# EAGLE board msp430_minimal_schematic (EAGLE 7.0.0)
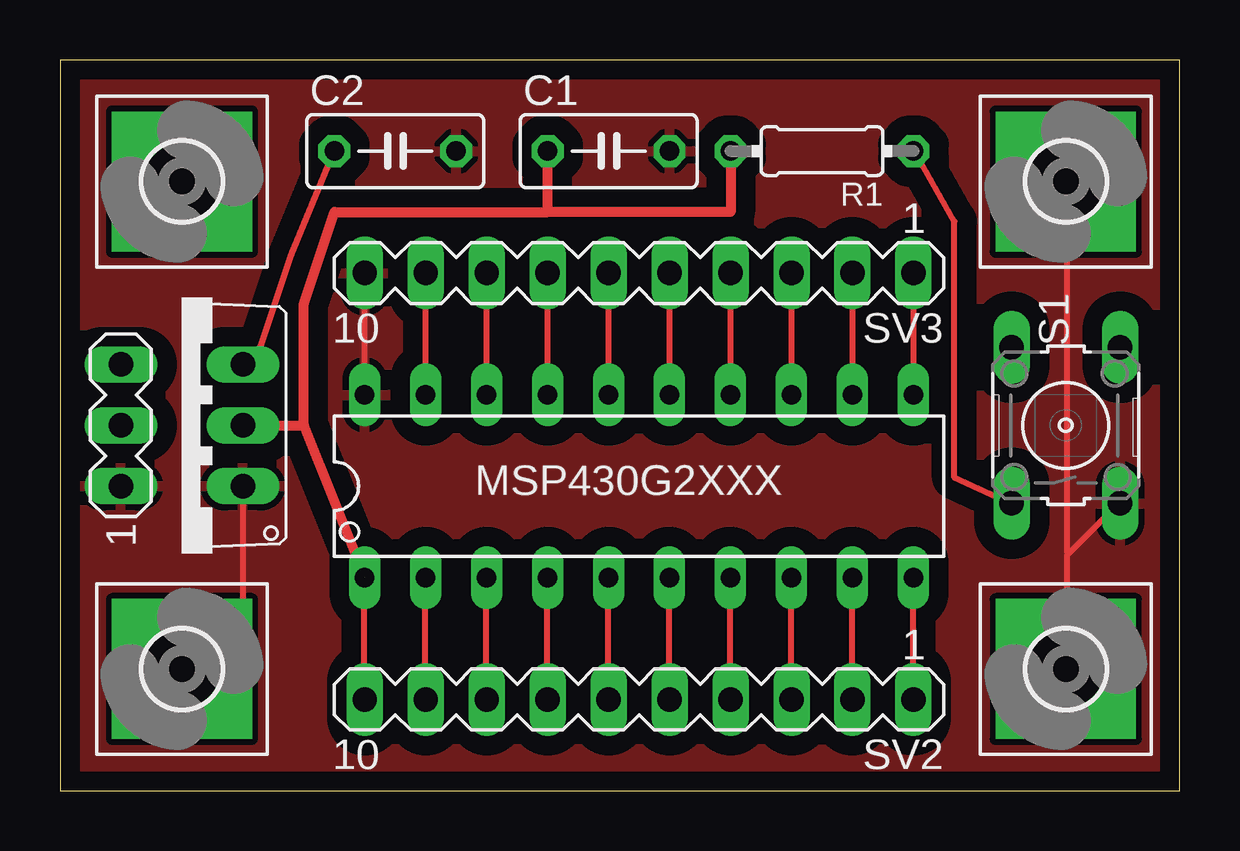
[diagram p0: board, top side]
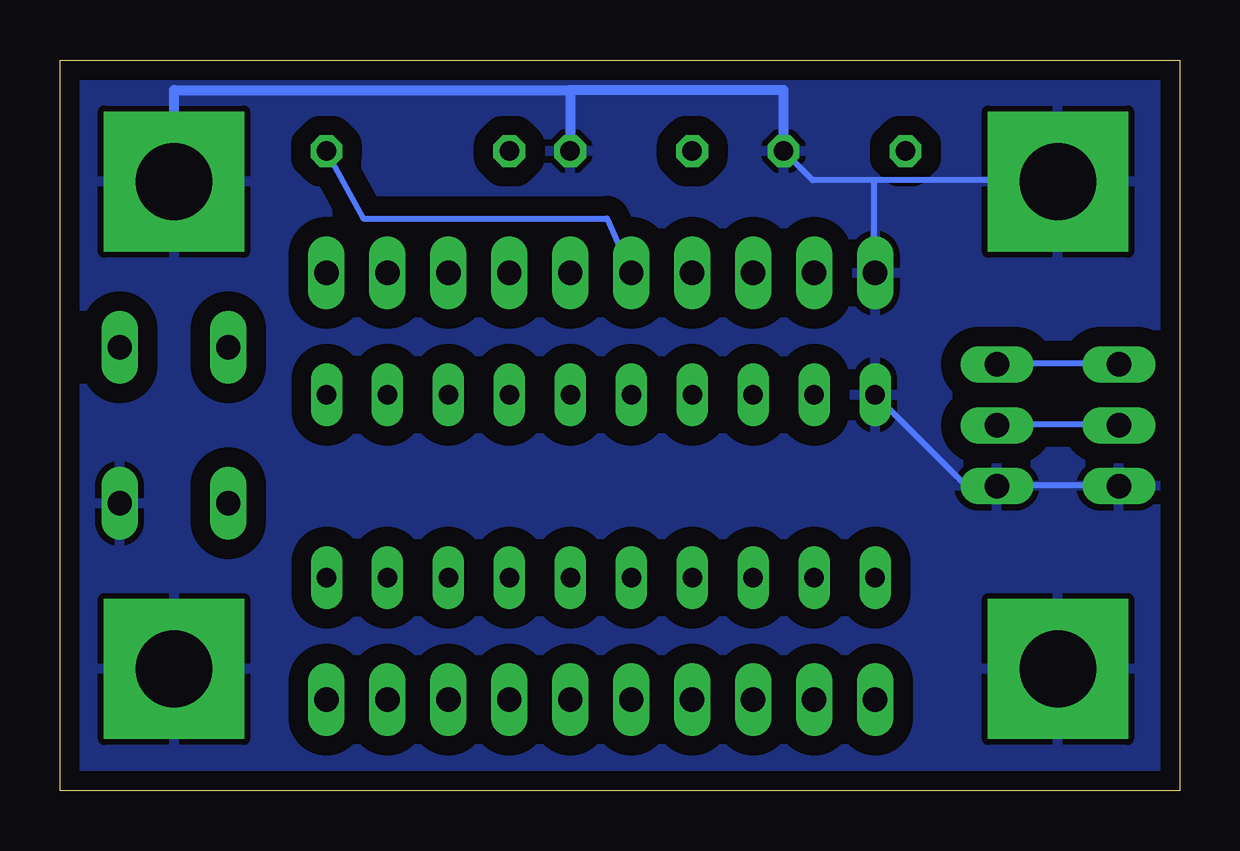
[diagram p1: board, bottom side, seen from below]

Size 46.66 x 30.47 mm. Coordinates in mm from the lower left corner, seen from the top.
Outline: 0,0 46.66,0 46.66,30.47 0,30.47 0,0
Copper layers (1*16): Top 0.035mm / dielectric 1.5mm / Bottom 0.035mm
Design rules "dirt_cheap_dirty_boards.v1": minimum track width 5mil, minimum drill 12mil, track to track 5mil, track to pad 5mil, pad to pad 5mil, via to via 5mil, smd to smd 0mil, copper to edge 10mil, drill to drill 10mil, minimum pad ring 10mil, minimum via ring 6mil, stop-mask expansion 2mil, vias tented up to drill 25mil, thermal gap 10mil

## Footprints (pad centres in the part's own frame; a part is rotated, then mirrored left to right if it is on the bottom)
C050-030X075 = drill 0.813 octagon: 1 -2.54,0; 2 2.54,0
3,2-PAD-SQUARE = drill 3.2 pad 5.842 square: B3,2 0,0
N20 = drill 0.813 long: 1 -11.435,-3.81; 2 -8.895,-3.81; 3 -6.355,-3.81; 4 -3.815,-3.81; 5 -1.275,-3.81; 6 1.265,-3.81; 7 3.805,-3.81; 8 6.345,-3.81; 9 8.885,-3.81; 10 11.425,-3.81; 11 11.425,3.81; 12 8.885,3.81; 13 6.345,3.81; 14 3.805,3.81; 15 1.265,3.81; 16 -1.275,3.81; 17 -3.815,3.81; 18 -6.355,3.81; 19 -8.895,3.81; 20 -11.435,3.81
0204/7 = drill 0.813 octagon: 1 -3.81,0; 2 3.81,0
TO220V = drill 1.016 long: 1 -2.54,-2.54; 2 0,-2.54; 3 2.54,-2.54
B3F-10XX = drill 1.016 long: 1 -3.251,2.261; 2 3.251,2.261; 3 -3.251,-2.261; 4 3.251,-2.261
MA03-1 = drill 1.016 long: 1 -2.54,0; 2 0,0; 3 2.54,0
MA10-1 = drill 1.016 long: 1 -11.43,0; 2 -8.89,0; 3 -6.35,0; 4 -3.81,0; 5 -1.27,0; 6 1.27,0; 7 3.81,0; 8 6.35,0; 9 8.89,0; 10 11.43,0

## Placement (x,y rotation side)
C1  100nF  [C050-030X075]  22.86,26.67 0 top
C2  100nF  [C050-030X075]  13.97,26.67 0 top
H1  MOUNT-PAD-SQUARE3.2  [3,2-PAD-SQUARE]  41.91,25.4 0 top
H2  MOUNT-PAD-SQUARE3.2  [3,2-PAD-SQUARE]  5.08,25.4 0 top
H3  MOUNT-PAD-SQUARE3.2  [3,2-PAD-SQUARE]  41.91,5.08 0 top
H4  MOUNT-PAD-SQUARE3.2  [3,2-PAD-SQUARE]  5.08,5.08 0 top
MSP430G2XXX  G2XX3---N20  [N20]  24.13,12.7 0 top
R1  47k  [0204/7]  31.75,26.67 180 top
REG  LM1117T-3.3-V  [TO220V]  5.08,15.24 90 top
S1  [B3F-10XX]  41.91,15.24 90 top
SV1  [MA03-1]  2.54,15.24 90 top
SV2  [MA10-1]  24.13,3.81 180 top
SV3  [MA10-1]  24.13,21.59 180 top

## Library data of the parts
C1 C2 R1 = rcl
H1-H4 = holes
MSP430G2XXX = TI_MSP430_v16
REG = lm1117
S1 = switch-omron; MPN: B3F-1000; OC_FARNELL: 176432; OC_NEWARK: 36M3542
SV1-SV3 = con-lstb; OC_FARNELL: unknown; OC_NEWARK: unknown

## Nets
+3.3V: C1.1 MSP430G2XXX.1 R1.2 REG.2 SV1.2 SV2.10
+5V: C2.1 REG.3 SV1.3
GND: C1.2 C2.2 H1.B3,2 H2.B3,2 H3.B3,2 H4.B3,2 MSP430G2XXX.20 REG.1 S1.3 SV1.1 SV3.10
P1.0: MSP430G2XXX.2 SV2.9
P1.1: MSP430G2XXX.3 SV2.8
P1.2: MSP430G2XXX.4 SV2.7
P1.3: MSP430G2XXX.5 SV2.6
P1.4: MSP430G2XXX.6 SV2.5
P1.5: MSP430G2XXX.7 SV2.4
P1.6: MSP430G2XXX.14 SV3.4
P1.7: MSP430G2XXX.15 SV3.5
P2.0: MSP430G2XXX.8 SV2.3
P2.1: MSP430G2XXX.9 SV2.2
P2.2: MSP430G2XXX.10 SV2.1
P2.3: MSP430G2XXX.11 SV3.1
P2.4: MSP430G2XXX.12 SV3.2
P2.5: MSP430G2XXX.13 SV3.3
P2.6: MSP430G2XXX.19 SV3.9
P2.7: MSP430G2XXX.18 SV3.8
RESET: MSP430G2XXX.16 R1.1 S1.1 SV3.6
TEST: MSP430G2XXX.17 SV3.7

## Tracks (layer width: path | path; a pad name or v marks a point on that pad's centre or on a via)
+3.3V  (1 unrouted)
  Top 0.254: SV2.10 12.69,3.86 12.69,8.88 MSP430G2XXX.1 12.81,8.94
  Top 0.406: REG.2 10.16,15.24 | 10.16,15.24 10.16,20.32 11.43,24.13 20.32,24.13 | 10.16,15.24 MSP430G2XXX.1 | 20.32,24.13 C1.1 | R1.2 27.94,24.13 20.32,24.13
  Bottom 0.254: SV1.2 2.59,15.29 7.61,15.29 REG.2
+5V
  Top 0.254: C2.1 9.64,22.34 8.37,18.53 REG.3
  Bottom 0.254: SV1.3 2.59,17.83 7.61,17.83 REG.3
GND
  Top 0.254: 42.02,9.89 41.96,9.83 41.96,5.13 H3.B3,2 | 42.02,9.89 44.12,11.99 S1.3 | H1.B3,2 41.96,25.39 41.96,9.96 42.02,9.89 | MSP430G2XXX.20 12.69,16.56 12.69,21.58 SV3.10 | H4.B3,2 7.61,7.61 7.61,12.69 REG.1
  Bottom 0.254: SV1.1 2.59,12.75 7.61,12.75 REG.1 7.61,12.88 9.07,12.88 12.69,16.5 MSP430G2XXX.20 | 25.39,26.72 C1.2 | C2.2 15.29,25.45 12.75,25.45 | 12.75,25.45 5.13,25.45 H2.B3,2 | 12.75,25.45 12.75,21.64 SV3.10
  Bottom 0.406: C2.2 16.51,29.21 25.4,29.21 | 25.4,29.21 C1.2 | H1.B3,2 41.91,29.21 25.4,29.21
  pour Top (isolate 0.813): 0,30.48 46.99,30.48 46.99,0 0,0
  pour Bottom (isolate 0.813): 0,30.48 46.99,30.48 46.99,0 0,0
P1.0
  Top 0.254: MSP430G2XXX.2 15.23,8.88 15.23,3.86 SV2.9
P1.1
  Top 0.254: MSP430G2XXX.3 17.77,8.88 17.77,3.86 SV2.8
P1.2
  Top 0.254: MSP430G2XXX.4 20.31,8.88 20.31,3.86 SV2.7
P1.3
  Top 0.254: MSP430G2XXX.5 22.85,8.88 22.85,3.86 SV2.6
P1.4
  Top 0.254: MSP430G2XXX.6 25.39,8.88 25.39,3.86 SV2.5
P1.5
  Top 0.254: MSP430G2XXX.7 27.93,8.88 27.93,3.86 SV2.4
P1.6
  Top 0.254: MSP430G2XXX.14 27.93,16.56 27.93,21.58 SV3.4
P1.7
  Top 0.254: MSP430G2XXX.15 25.39,16.56 25.39,21.58 SV3.5
P2.0
  Top 0.254: MSP430G2XXX.8 30.47,8.88 30.47,3.86 SV2.3
P2.1
  Top 0.254: MSP430G2XXX.9 33.01,8.88 33.01,3.86 SV2.2
P2.2
  Top 0.254: MSP430G2XXX.10 35.55,8.88 35.55,3.86 SV2.1
P2.3
  Top 0.254: MSP430G2XXX.11 35.55,16.56 35.55,21.58 SV3.1
P2.4
  Top 0.254: MSP430G2XXX.12 33.01,16.56 33.01,21.58 SV3.2
P2.5
  Top 0.254: MSP430G2XXX.13 30.47,16.56 30.47,21.58 SV3.3
P2.6
  Top 0.254: MSP430G2XXX.19 15.23,16.56 15.23,21.58 SV3.9
P2.7
  Top 0.254: MSP430G2XXX.18 17.77,16.56 17.77,21.58 SV3.8
RESET
  Top 0.254: MSP430G2XXX.16 22.85,16.56 22.85,21.58 SV3.6 | R1.1 35.61,26.66 37.26,23.74 37.26,13.07 39.61,11.99 S1.1
  Bottom 0.254: SV3.6 23.86,23.86 34.02,23.86 R1.1
TEST
  Top 0.254: MSP430G2XXX.17 20.31,16.56 20.31,21.58 SV3.7